# Altium PCB TrueTouch.PcbDoc
Units mil, origin at the board's own origin, x right, y up, seen from the top; angles counter-clockwise.
Board outline 4500 x 3500 mil, 2 copper layers (Top Layer, Bottom Layer); 42 components, 34 nets, 146 pads, 8 vias.
Unrouted connection lines stored in the file: 21.
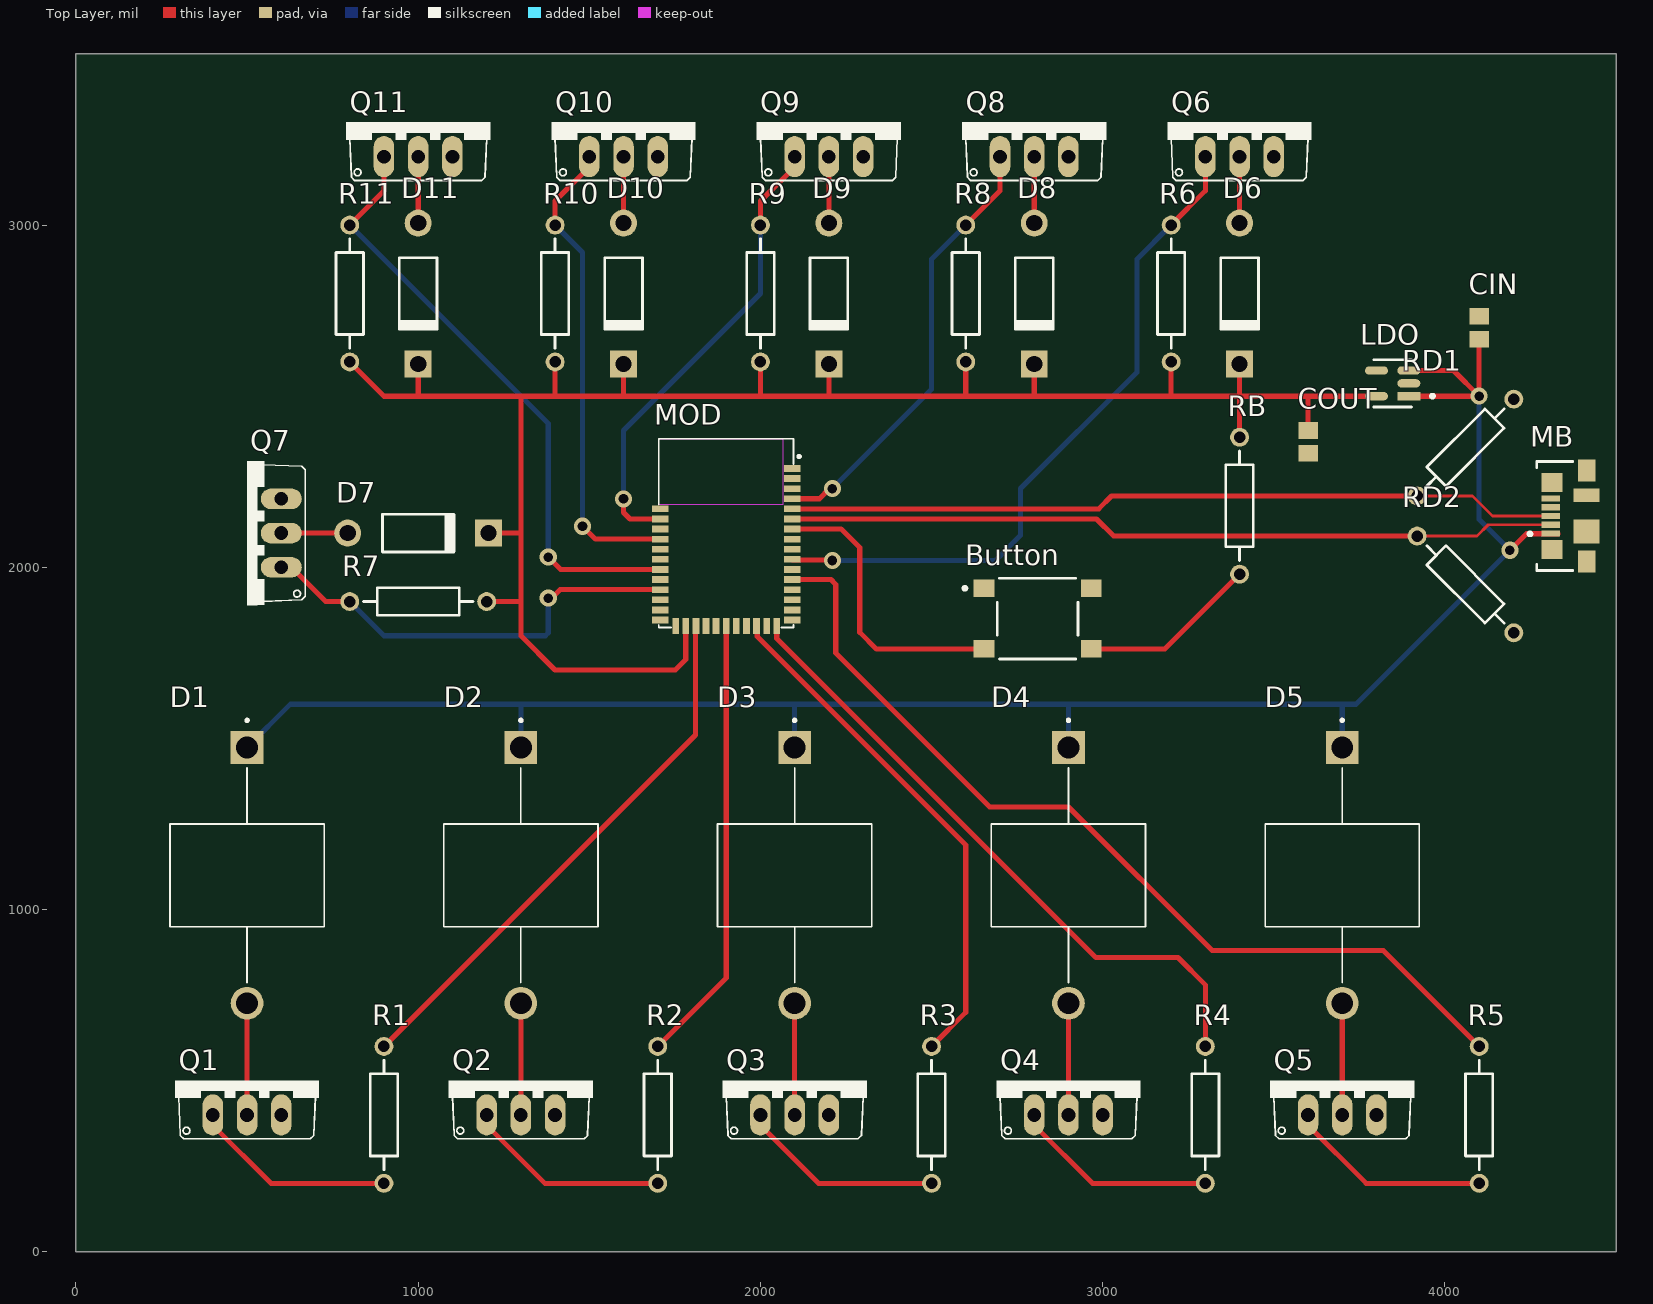
[diagram p0: Top Layer view]
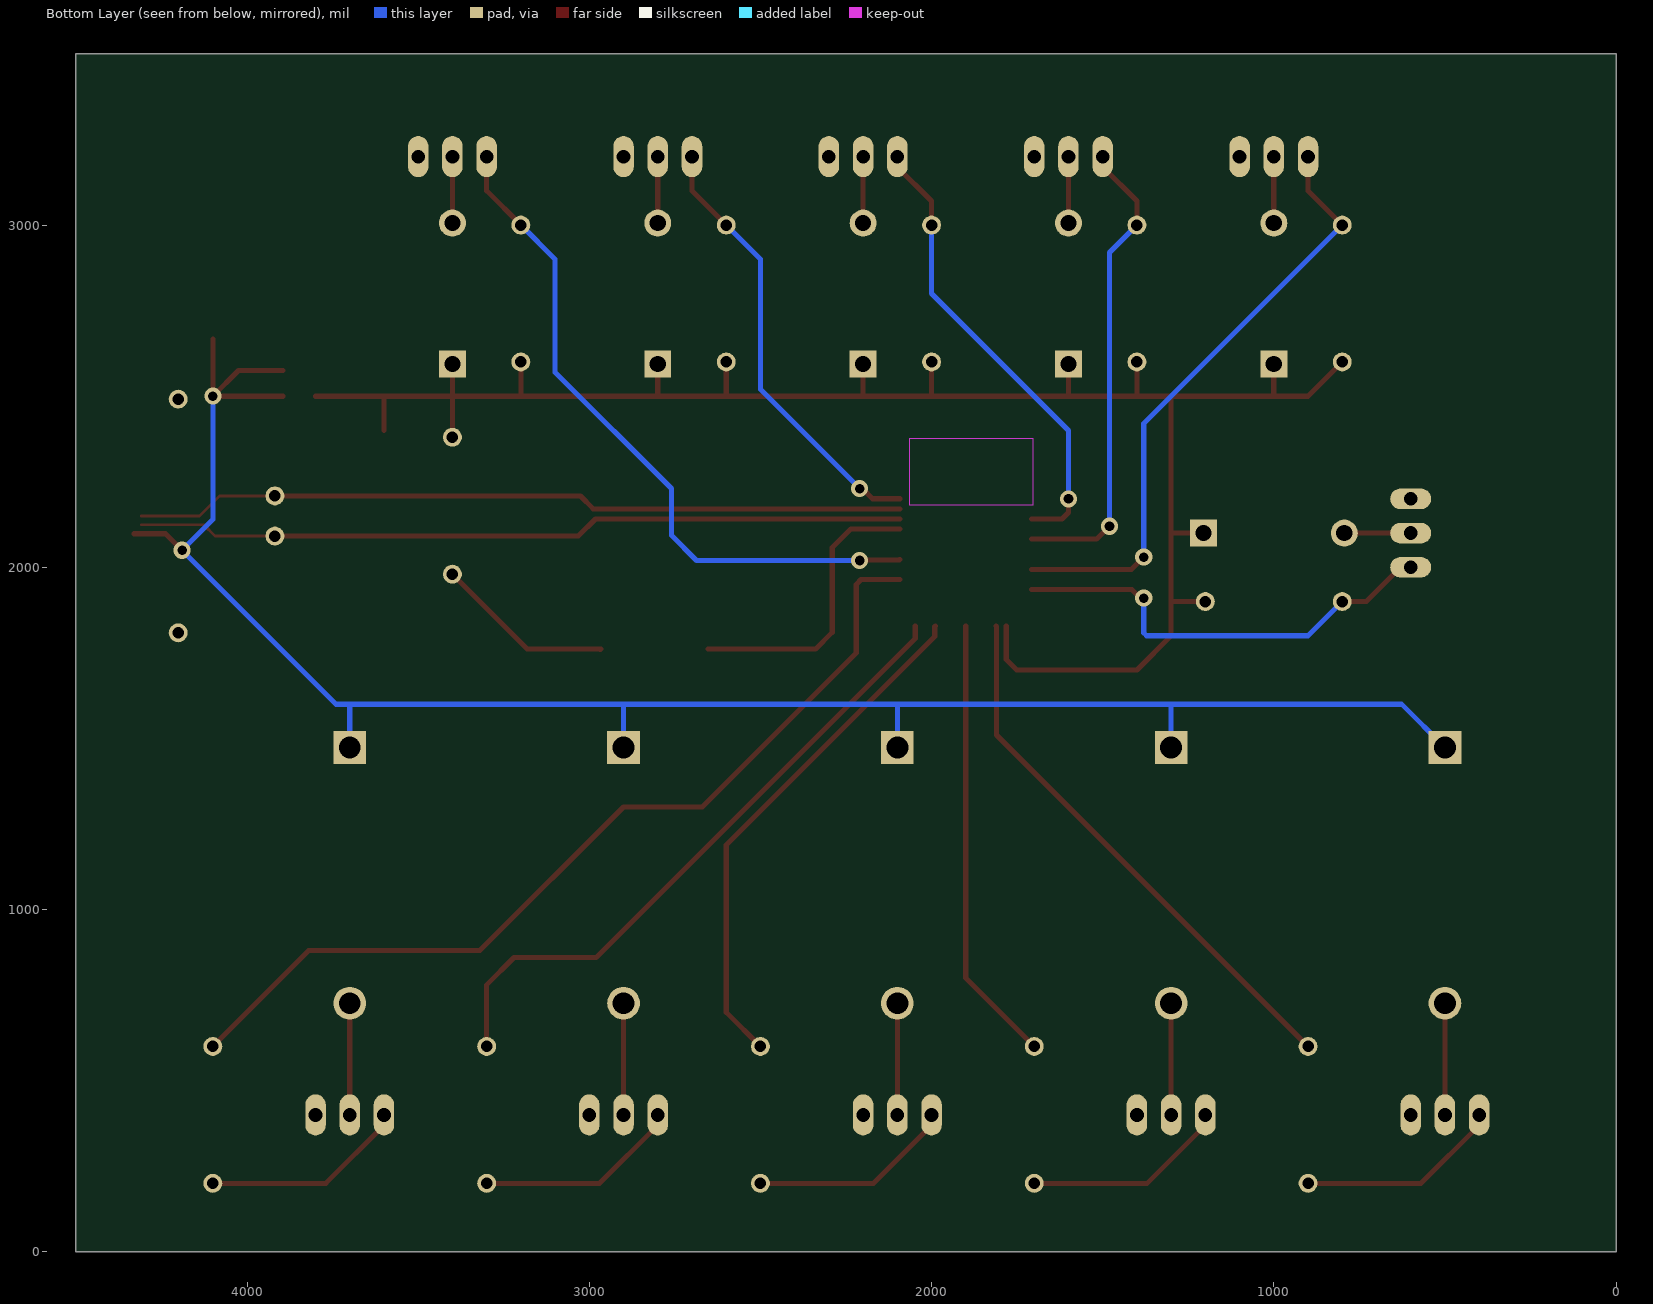
[diagram p1: Bottom Layer view, seen from below]

## Layer stack, top to bottom
Top Solder: solder mask 0.4, Solder Resist, Dk 3.5
Top Layer: signal copper 1.4
Dielectric 1: dielectric 12.6, FR-4, Dk 4.8
Bottom Layer: signal copper 1.4
Bottom Solder: solder mask 0.4, Solder Resist, Dk 3.5

## Board outline
0,0 4500,0 4500,3500 0,3500

## Design rules (kind name [scope] priority, off if disabled: settings)
Clearance [All] p1: gap=10 ignorepadtopadclearanceinfootprint=FALSE except(0: Arc-Hole Track-Hole SMDPad-Hole THPad-Hole Via-Hole Fill-Hole Poly-Hole Region-Hole Text-Hole)
PolygonConnect [All] p1: connectstyle=Relief reliefconductorwidth=10 reliefentries=4 polygonreliefangle="90 Angle" airgapwidth=10
RoutingVias [All] p1: holewidth=28 width=50 viastyle="Through Hole" minholewidth=28 minwidth=50 maxholewidth=28 maxwidth=50
SolderMaskExpansion [All] p1: expansion=4 istentingtop=FALSE
Width [All] p1: maxlimit=25 minlimit=8 preferedwidth=15 minimp=50.000000 maximp=50.000000 favimp=50.000000
30 further rules are at their usual default settings.

## Components (designator, comment, footprint, x,y, rotation, side; value= is the part's Value field where it differs from the comment)
Button "PTS645SM43SMTR92LFS" FP-PTS645SM43SMTR92LFS-MFG 2810,1850 r0 top
CIN "1uF" CAPC2013X140X45NL15T25 4100,2700 r270 top
COUT "1uF" CAPC2013X140X45NL15T25 3600,2366.54 r90 top
D1 "1N5824" DIOAD1898W129L762D1143 500,1100 r270 top
D2 "1N5824" DIOAD1898W129L762D1143 1300,1100 r270 top
D3 "1N5824" DIOAD1898W129L762D1143 2100,1100 r270 top
D4 "1N5824" DIOAD1898W129L762D1143 2900,1100 r270 top
D5 "1N5824" DIOAD1898W129L762D1143 3700,1100 r270 top
D6 "Diode 1N4004" DO-41 3400,2800 r270 top
D7 "Diode 1N4004" DO-41 1000,2100 r0 top
D8 "Diode 1N4004" DO-41 2800,2800 r270 top
D9 "Diode 1N4004" DO-41 2200,2800 r270 top
D10 "Diode 1N4004" DO-41 1600,2800 r270 top
D11 "Diode 1N4004" DO-41 1000,2800 r270 top
LDO "AP2112K-3.3TRG1" FP-SOT25-IPC_A 3847.27,2537.4 r180 top
MB "473460001" FP-473460001-MFG 4400,2150 r90 top
MOD "BL652-SC-01-T/R" XCVR_BL652-SC-01-T/R 1900,2100 r0 top
Q1 "FQP30N06L" TO220V 500,500 r0 top
Q2 "FQP30N06L" TO220V 1300,500 r0 top
Q3 "FQP30N06L" TO220V 2100,500 r0 top
Q4 "FQP30N06L" TO220V 2900,500 r0 top
Q5 "FQP30N06L" TO220V 3700,500 r0 top
Q6 "FQP30N06L" TO220V 3400,3300 r0 top
Q7 "FQP30N06L" TO220V 500,2100 r90 top
Q8 "FQP30N06L" TO220V 2800,3300 r0 top
Q9 "FQP30N06L" TO220V 2200,3300 r0 top
Q10 "FQP30N06L" TO220V 1600,3300 r0 top
Q11 "FQP30N06L" TO220V 1000,3300 r0 top
R1 "Res2" AXIAL-0.4 900,400 r90 top value=1K
R2 "Res2" AXIAL-0.4 1700,400 r90 top value=1K
R3 "Res2" AXIAL-0.4 2500,400 r90 top value=1K
R4 "Res2" AXIAL-0.4 3300,400 r90 top value=1K
R5 "Res2" AXIAL-0.4 4100,400 r90 top value=1K
R6 "Res2" AXIAL-0.4 3200,2800 r90 top value=1K
R7 "Res2" AXIAL-0.4 1000,1900 r180 top value=1K
R8 "Res2" AXIAL-0.4 2600,2800 r90 top value=1K
R9 "Res2" AXIAL-0.4 2000,2800 r90 top value=1K
R10 "Res2" AXIAL-0.4 1400,2800 r90 top value=1K
R11 "Res2" AXIAL-0.4 800,2800 r90 top value=1K
RB "Res2" AXIAL-0.4 3400,2180 r90 top value=1K
RD1 "Res2" AXIAL-0.4 4060,2350 r45 top value=1K
RD2 "Res2" AXIAL-0.4 4060,1950 r315 top value=1K

## Footprints (in the part's own frame and the unit in brackets; to place one, negate y for a bottom-side part, rotate by r counter-clockwise, add the part's x,y. Pads: shape width x height; smd on the part's side, far side on the other; paste and mask are expansions set on the pad)
AXIAL-0.4 [mm] "Axial Device, Thru-Hole; 2 Leads; 0.4 in Pin Spacing"
  round 1.4 hole 0.85: 1(-5.08,0) 2(5.08,0)
  silkscreen extent -4.06,-1.02 4.06,1.02
CAPC2013X140X45NL15T25 [mm] "Chip Capacitor, 2-Leads, Body 2.00x1.25mm, IPC Medium Density"
  rect 1.25x1.45 smd: 1(-0.85,0) 2(0.85,0)
  body extent -1.08,-0.7 1.07,0.7, height 1.4
DIOAD1898W129L762D1143 [mm]
  round 2.43 hole 1.62: A(9.49,0)
  rect 2.43x2.43 hole 1.62: C(-9.49,0)
  silkscreen extent -11.6,-5.72 7.96,5.72
DO-41 [mm] "Diode, Axial; Body 5.2 x 2.7 mm (LxDia. max), Lead Dia. 0.86 mm (max)"
  round 2 hole 1.2: 1(-5.23,0)
  rect 2x2 hole 1.2: 2(5.23,0)
  silkscreen extent -2.65,-1.4 2.75,1.4
FP-473460001-MFG [mm]
  rect 0.45x1.38 smd paste+0 mask+0: 1(-1.3,2.31) 2(-0.65,2.31) 3(0,2.31) 4(0.65,2.31) 5(1.3,2.31)
  rect 1.425x1.55 smd paste+0 mask+0: 6(-2.488,2.225) 7(2.488,2.225)
  rect 1.65x1.3 smd paste+0 mask+0: 8(-3.375,-0.35) 11(3.375,-0.35)
  rect 1.8x1.9 smd paste+0 mask+0: 9(-1.15,-0.35)
  rect 1x1.9 smd paste+0 mask+0: 10(1.55,-0.35)
  silkscreen extent -4.05,0.67 4.05,3.97, body extent -4.3,-2.48 4.3,3.45, height 0.25
FP-PTS645SM43SMTR92LFS-MFG [mm]
  rect 1.55x1.3 smd paste+0 mask+0: 1(-3.975,2.25) 2(3.975,2.25) 3(-3.975,-2.25) 4(3.975,-2.25)
  silkscreen extent -5.52,-3 3,3, body extent -4.85,-3.1 4.85,3.1, height 0.25
FP-SOT25-IPC_A [mm]
  rect 1.707x0.616 smd paste+0 mask+0: 1(-1.201,0.95)
  rrect100% 1.707x0.616 smd paste+0 mask+0: 2(-1.201,0) 3(-1.201,-0.95) 4(1.201,-0.95) 5(1.201,0.95)
  silkscreen extent -3.08,-1.75 1.4,1.75, body extent -2.55,-2 2.55,2, height 0.25
TO220V [mil]
  oval 60x120 hole 40: 1(-100,-100) 2(0,-100) 3(100,-100)
  silkscreen extent -210,-170 210,0
XCVR_BL652-SC-01-T/R [mm]
  rect 1.2x0.5 smd: 1(4.9,4.8) 2(4.9,4.05) 3(4.9,3.3) 4(4.9,2.55) 5(4.9,1.8) 6(4.9,1.05) 7(4.9,0.3) 8(4.9,-0.45) 9(4.9,-1.2) 10(4.9,-1.95) 11(4.9,-2.7) 12(4.9,-3.45) 13(4.9,-4.2) 14(4.9,-4.95) 15(4.9,-5.7) 16(4.9,-6.45) 28(-4.9,-6.45) 29(-4.9,-5.7) 30(-4.9,-4.95) 31(-4.9,-4.2) 32(-4.9,-3.45) 33(-4.9,-2.7) 34(-4.9,-1.95) 35(-4.9,-1.2) 36(-4.9,-0.45) 37(-4.9,0.3) 38(-4.9,1.05) 39(-4.9,1.8)
  rect 0.5x1.2 smd: 17(3.75,-6.9) 18(3,-6.9) 19(2.25,-6.9) 20(1.5,-6.9) 21(0.75,-6.9) 22(0,-6.9) 23(-0.75,-6.9) 24(-1.5,-6.9) 25(-2.25,-6.9) 26(-3,-6.9) 27(-3.75,-6.9)
  Keep-Out Layer region: 4.2,2.105 -5.012,2.105 -5.012,7 4.2,7
  Keep-Out Layer region: 4.2,2.107 -5.016,2.107 -5.016,7 4.2,7
  Keep-Out Layer region: 4.2,2.105 -5.012,2.105 -5.012,7 4.2,7
  silkscreen extent -5,-7 5.51,7

## Part data
Button: library part CMP-2000-05160-2, "SWITCH TACTILE SPST-NO 0.05A 12V", Case/Package=SMD/SMT, Color=Black, Contact Resistance=100mR, Current Rating=50mA, Max Operating Temperature=60°C, Max Voltage Rating (DC)=12V, Min Operating Temperature=-20°C, Operating Force=160gf, Package Quantity=1, Actuator Length=0.85mm, Actuator Material=Nylon, Actuator Type=Standard, Contact Material=Silver, Contact Plating=Silver, Depth=9mm, Illumination Type=Non-Illuminated, Lead Free="Lead Free", Length=6mm, Max Current Rating=50mA, Mechanical Life=100000Cycles, Mount="Surface Mount", Orientation=Straight, Packaging="Tape and Reel", REACH SVHC="No SVHC", Switch Function=Off-Mom, Termination="Gull Wing", Throw Configuration=SPST, Voltage Rating (DC)=12V
CIN COUT: library part CMP-2007-03403-1, Manufacturer=Murata, Part Number=GRM21BR71E105KA99L
D1 D2 D3 D4 D5: "Diode Schottky 30V 5A Through Hole Axial", Package="Axial Microsemi", Availability=Unavailable, MF="Microsemi Corporation", MP=1N5824, Price=None, SnapEDA_Link=https://www.snapeda.com/parts/1N5824/Microsemi%20Corporation/view-part/49055/?ref=snap
D6 D7 D8 D9 D10 D11: "1 Amp General Purpose Rectifier", Code_JEDEC=DO-204-AL, ComponentLink1Description="Manufacturer Link", ComponentLink1URL=http://www.fairchildsemi.com/, ComponentLink2Description=Datasheet, ComponentLink2URL=http://www.fairchildsemi.com/ds/1N%2F1N4001.pdf, DatasheetVersion=1998, LatestRevisionDate=17-Jul-2002, LatestRevisionNote="Re-released for DXP Platform.", PackageDescription="Diode, Axial; Body 5.2 x 2.7 mm (LxDia. max), Lead Dia. 0.86 mm (max)", PackageReference=DO-41, PackageVersion=Aug-1999, Published=8-Jun-2000, Publisher="Altium Limited"
LDO: library part CMP-12756-000035-1, "IC REG LINEAR 3.3V 600MA SOT25", Case/Package=SOT-23-5, Dropout Voltage=250mV, Max Input Voltage=6V, Max Operating Temperature=85°C, Max Output Current=600mA, Min Input Voltage=2.5V, Min Operating Temperature=-40°C, Output Voltage=3.3V, Package Quantity=1, Quiescent Current=55uA, Accuracy=1.5%, Height=1.3mm, Lead Free="Lead Free", Length=3.1mm, Mount="Surface Mount", Number of Outputs=1, Number of Pins=5, Number of Regulators=1, Output Current=600mA, Output Type=Fixed, Packaging="Tape and Reel", Polarity=Positive, Width=1.7mm
MB: library part CMP-2000-05246-2, "CONN RCPT USB2.0 MICRO B SMD R/A", Current Rating=1.8A, Manufacturer=Molex, Package=0, Temperature="-30°C to +85°C", Temperature Range High=+85°C, Temperature Range Low=-30°C, Voltage Rating=30V, Automotive=No, Category=Conn, ComponentLink2Description=Datasheet, ComponentLink2URL=https://www.molex.com/webdocs/datasheets/pdf/en-us/0473460001_IO_CONNECTORS.pdf, Conn Orientation="Right Angle", Contact Material=Gold,Nickel, Device Class L1=Connectors, Device Class L2="USB Connectors", Device Class L3=unset, Digikey Description="CONN RCPT USB2.0 MICRO B SMD R/A", Footprint Url=https://www.molex.com/pdm_docs/sd/473460001_sd.pdf, Height=2.945mm, Is Female=yes, Lead Free=Yes, Manufacturer Part Number=473460001, Number Of Contacts=5, Octopart=https://octopart.com/47346-0001-molex-7164928, Pitch=0.65mm, RoHS=TRUE, Shielding=true, Usb Standard="USB 2.0"
MOD: "Bluetooth Bluetooth v5.0 Transceiver Module 2.4GHz Antenna Not Included, I-PEX MHF4 Surface Mount", Package="SMD-39 Laird", Digi-Key_Part_Number=BL652-SC-01-CT-ND, DigiKey-Purchase-URL=https://snapeda.com/shop?store=DigiKey&id=1215493, MF="Laird -", MP=BL652-SC-01-T/R, SnapEDA_Link=https://www.snapeda.com/parts/BL652-SC-01-T/R/Laird%20-%20Wireless%20&%20Thermal%20Systems/view-part/1215493/?ref=snap
Q1 Q2 Q3 Q4 Q5 Q6 Q7 Q8 Q9 Q10 Q11: "N-Channel 60V 32A _Tc_ 79W _Tc_ Through Hole TO-220-3", Package="TO-220 ON Semiconductor", Availability=Unavailable, MF="ON Semiconductor", MP=FQP30N06L, Price=None, SnapEDA_Link=https://www.snapeda.com/parts/FQP30N06L/ON%20Semiconductor/view-part/1413126/?ref=snap
R1 R2 R3 R4 R5 R6 R7 R8 R9 R10 R11 RB RD1 RD2: "Resistor", LatestRevisionDate=17-Jul-2002, LatestRevisionNote="Re-released for DXP Platform.", PackageDescription="Axial Device, Thru-Hole; 2 Leads; 0.4 in Pin Spacing", PackageReference=AXIAL-0.4, Published=8-Jun-2000, Publisher="Altium Limited"

## Via types
v1: diameter 50, hole 28, Top Layer to Bottom Layer, 8 vias

## Nets (pads, with @x,y where several pads share a name; then routed paths per layer and width w, separated by ;. In a path a pad name is that pad's centre, name@x,y a point inside that pad or via, vN(x,y) a via of type N, cw(c..) or ccw(c..) an arc to the next point about the centre after c; other vN are vias at no path point)
+3V3: COUT.2 D6.2 D7.2 D8.2 D9.2 D10.2 D11.2 LDO.5 MOD.26 R6.1 R7.1 R8.1 R9.1 R10.1 R11.1 RB.2 | length 5659.7
  Top Layer w15: R11.1 900,2500 1000,2500 ; D11.2 1000,2500 ; R7.1 1300,1900 ; D7.2 1300,2100 ; R10.1 1400,2500 ; D10.2 1600,2500 ; MOD.26 1781.89,1730.68 1751.21,1700 1400,1700 1300,1800 1300,1900 ; R9.1 2000,2500 ; D9.2 2200,2500 ; R8.1 2600,2500 ; D8.2 2800,2500 ; R6.1 3200,2500 ; RB.2 3400,2500 ; D6.2 3400,2500 ; COUT.2 3600,2500 ; LDO.5 3600,2500 ; 1000,2500 1300,2500 ; 1300,1900 1300,2100 ; 1300,2100 1300,2500 ; 1300,2500 1400,2500 ; 1400,2500 1600,2500 ; 1600,2500 2000,2500 ; 2000,2500 2200,2500 ; 2200,2500 2600,2500 ; 2600,2500 2800,2500 ; 2800,2500 3200,2500 ; 3200,2500 3400,2500 ; 3400,2500 3600,2500
+5: CIN.2 D1.C D2.C D3.C D4.C D5.C LDO.1 LDO.3 MB.1 | length 5689.9
  Top Layer w15: LDO.1 v1(4100,2500) ; LDO.3 4025.2,2574.8 v1(4100,2500) ; CIN.2 v1(4100,2500) ; v1(4190,2050) 4238.05,2098.05 MB.1@4330,2098.05
  Bottom Layer w15: D1.C 626.38,1600 1300,1600 ; D2.C 1300,1600 ; D3.C 2100,1600 ; D4.C 2900,1600 ; D5.C 3700,1600 ; v1(4100,2500) 4100,2140 v1(4190,2050) 3740,1600 3700,1600 ; 1300,1600 2100,1600 ; 2100,1600 2900,1600 ; 2900,1600 3700,1600
D+: MB.3 MOD.5 RD1.1 | length 2256
  Top Layer w8: RD1.1 4080.69,2208.58 4139.26,2150 MB.3
  Top Layer w15: MOD.5 2988.43,2170.87 3026.14,2208.58 RD1.1
D-: MB.2 MOD.6 RD2.1 | length 2250.5
  Top Layer w8: RD2.1 4093.48,2091.42 4126.47,2124.41 MB.2
  Top Layer w15: MOD.6 2982.33,2141.34 3032.24,2091.42 RD2.1
GND: Button.2 CIN.1 COUT.1 LDO.2 MB.5 MOD.1 MOD.16 MOD.27 MOD.39 Q1.3 Q2.3 Q3.3 Q4.3 Q5.3 Q6.3 Q7.3 Q8.3 Q9.3 Q10.3 Q11.3 RD1.2 RD2.2
NetButton_3: Button.3 MOD.7 | length 850.8
  Top Layer w15: MOD.7 2235.82,2111.81 2290,2057.63 2290,1810 2338.58,1761.42 Button.3
NetButton_4: Button.4 RB.1 | length 534.2
  Top Layer w15: Button.4@2967.91,1760 Button.4 3181.42,1761.42 RB.1 RB.1@3391.89,1980
NetD1_A: D1.A Q1.2 | length 326.4
  Top Layer w15: Q1.2 D1.A
NetD2_A: D2.A Q2.2 | length 326.4
  Top Layer w15: Q2.2 D2.A
NetD3_A: D3.A Q3.2 | length 326.4
  Top Layer w15: Q3.2 D3.A
NetD4_A: D4.A Q4.2 | length 326.4
  Top Layer w15: Q4.2 D4.A
NetD5_A: D5.A Q5.2 | length 326.4
  Top Layer w15: Q5.2 D5.A
NetD6_1: D6.1 Q6.2 | length 194.1
  Top Layer w15: D6.1 Q6.2
NetD7_1: D7.1 Q7.2 | length 194.1
  Top Layer w15: Q7.2 D7.1
NetD8_1: D8.1 Q8.2 | length 194.1
  Top Layer w15: D8.1 Q8.2
NetD9_1: D9.1 Q9.2 | length 194.1
  Top Layer w15: D9.1 Q9.2
NetD10_1: D10.1 Q10.2 | length 194.1
  Top Layer w15: D10.1 Q10.2
NetD11_1: D11.1 Q11.2 | length 194.1
  Top Layer w15: D11.1 Q11.2
NetMOD_4: MOD.4 Q8.1 R8.2 | length 1302.3
  Top Layer w15: MOD.4 2172.43,2200.39 2202.04,2230 v1(2210,2230) ; R8.2 2700,3100 Q8.1
  Bottom Layer w15: v1(2210,2230) 2500,2520 2500,2900 R8.2
NetMOD_10: MOD.10 Q6.1 R6.2 | length 2029
  Top Layer w15: MOD.10 2094.53,2021.61 2208.39,2021.61 v1(2210,2020) ; R6.2 3300,3100 Q6.1
  Bottom Layer w15: v1(2210,2020) 2686.42,2020 2760,2093.58 2760,2230 3100,2570 3100,2900 R6.2
NetMOD_12: MOD.12 R5.2 | length 2689.3
  Top Layer w15: MOD.12 2205.83,1964.17 2220,1950 2220,1750 2670,1300 2900,1300 3320,880 3820,880 R5.2
NetMOD_17: MOD.17 R4.2 | length 1887.7
  Top Layer w15: MOD.17 2047.64,1792.36 2980,860 3220,860 3300,780 R4.2
NetMOD_19: MOD.19 R3.2 | length 1523
  Top Layer w15: MOD.19 1990.77,1826.16 1990.77,1797.48 2600,1188.24 2600,700 R3.2
NetMOD_22: MOD.22 R2.2 | length 1311.2
  Top Layer w15: R2.2 1900,800 MOD.22
NetMOD_25: MOD.25 R1.2 | length 1605.9
  Top Layer w15: R1.2 1810,1510 1810,1826.93 MOD.25
NetMOD_31: MOD.31 Q7.1 R7.2 | length 1305
  Top Layer w15: Q7.1 630,2000 730,1900 R7.2 ; v1(1380,1910) 1389.47,1910 1414.12,1934.65 MOD.31
  Bottom Layer w15: R7.2 900,1800 1371.21,1800 1380,1808.79 v1(1380,1910)
NetMOD_33: MOD.33 Q11.1 R11.2 | length 1793.8
  Top Layer w15: R11.2 900,3100 Q11.1 ; v1(1380,2030) 1416.3,1993.7 MOD.33
  Bottom Layer w15: R11.2 1380,2420 v1(1380,2030)
NetMOD_36: MOD.36 Q10.1 R10.2 | length 1397.3
  Top Layer w15: R10.2 1400,3070 1500,3170 Q10.1 ; v1(1480,2120) 1517.72,2082.28 MOD.36
  Bottom Layer w15: R10.2 1480,2920 v1(1480,2120)
NetMOD_38: MOD.38 Q9.1 R9.2 | length 1361.9
  Top Layer w15: v1(1600,2200) 1600,2160 1618.66,2141.34 MOD.38 ; R9.2 2000,3070 2100,3170 Q9.1
  Bottom Layer w15: v1(1600,2200) 1600,2400 2000,2800 R9.2
NetQ1_1: Q1.1 R1.1 | length 600.4
  Top Layer w15: Q1.1 400,370 570,200 R1.1
NetQ2_1: Q2.1 R2.1 | length 600.4
  Top Layer w15: Q2.1 1200,370 1370,200 R2.1
NetQ3_1: Q3.1 R3.1 | length 600.4
  Top Layer w15: Q3.1 2000,370 2170,200 R3.1
NetQ4_1: Q4.1 R4.1 | length 600.4
  Top Layer w15: Q4.1 2800,370 2970,200 R4.1
NetQ5_1: Q5.1 R5.1 | length 600.4
  Top Layer w15: Q5.1 3600,370 3770,200 R5.1
pads on no net: Button.1 LDO.4 MB.4 MB.6 MB.7 MB.8 MB.9 MB.10 MB.11 MOD.2 MOD.3 MOD.8 MOD.9 MOD.11 MOD.13 MOD.14 MOD.15 MOD.18 MOD.20 MOD.21 MOD.23 MOD.24 MOD.28 MOD.29 MOD.30 MOD.32 MOD.34 MOD.35 MOD.37

## Text inside footprints (layer, text, board x,y; h text height)
Q1: Top 3D Body "1" at 374.75,374.75 h50.1; Top 3D Body "2" at 474.97,374.83 h50.07; Top 3D Body "3" at 575.06,374.9 h50.04
Q2: Top 3D Body "1" at 1174.75,374.75 h50.1; Top 3D Body "2" at 1274.97,374.83 h50.07; Top 3D Body "3" at 1375.06,374.9 h50.04
Q3: Top 3D Body "1" at 1974.75,374.75 h50.1; Top 3D Body "2" at 2074.97,374.83 h50.07; Top 3D Body "3" at 2175.06,374.9 h50.04
Q4: Top 3D Body "1" at 2774.75,374.75 h50.1; Top 3D Body "2" at 2874.97,374.83 h50.07; Top 3D Body "3" at 2975.06,374.9 h50.04
Q5: Top 3D Body "1" at 3574.75,374.75 h50.1; Top 3D Body "2" at 3674.97,374.83 h50.07; Top 3D Body "3" at 3775.06,374.9 h50.04
Q6: Top 3D Body "1" at 3274.75,3174.75 h50.1; Top 3D Body "2" at 3374.97,3174.83 h50.07; Top 3D Body "3" at 3475.06,3174.9 h50.04
Q7: Top 3D Body "1" at 625.25,1974.75 h50.1 r90; Top 3D Body "2" at 625.17,2074.97 h50.07 r90; Top 3D Body "3" at 625.1,2175.06 h50.04 r90
Q8: Top 3D Body "1" at 2674.75,3174.75 h50.1; Top 3D Body "2" at 2774.97,3174.83 h50.07; Top 3D Body "3" at 2875.06,3174.9 h50.04
Q9: Top 3D Body "1" at 2074.75,3174.75 h50.1; Top 3D Body "2" at 2174.97,3174.83 h50.07; Top 3D Body "3" at 2275.06,3174.9 h50.04
Q10: Top 3D Body "1" at 1474.75,3174.75 h50.1; Top 3D Body "2" at 1574.97,3174.83 h50.07; Top 3D Body "3" at 1675.06,3174.9 h50.04
Q11: Top 3D Body "1" at 874.75,3174.75 h50.1; Top 3D Body "2" at 974.97,3174.83 h50.07; Top 3D Body "3" at 1075.06,3174.9 h50.04